# EAGLE board ArduinoBluetoothMatev13 (EAGLE 5.00)
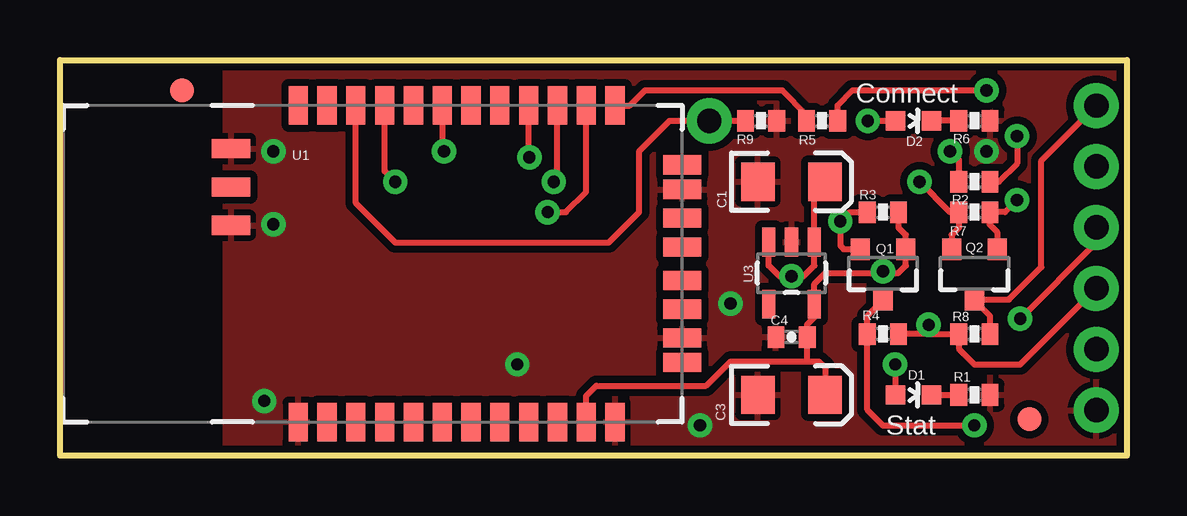
[diagram p0: board, top side]
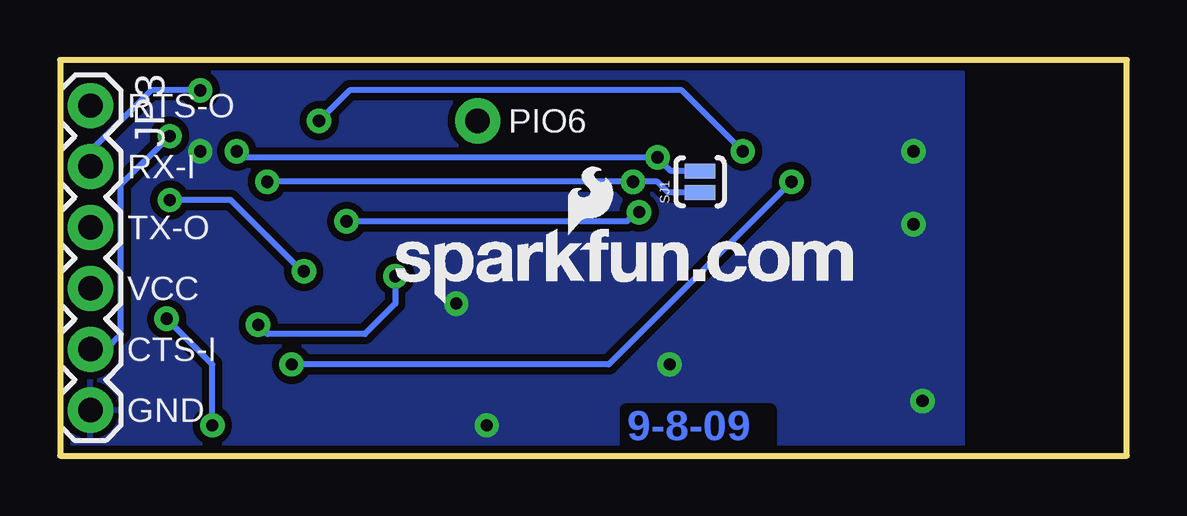
[diagram p1: board, bottom side, seen from below]

Size 44.45 x 16.51 mm. Coordinates in mm from the lower left corner, seen from the top.
Outline: 0,0 0,16.51 44.45,16.51 44.45,0 0,0
Copper layers (1*16): Top 0.035mm / dielectric 1.5mm / Bottom 0.035mm
Design rules "SparkFun": minimum track width 8mil, minimum drill 20mil, track to track 8mil, track to pad 8mil, pad to pad 8mil, via to via 8mil, smd to smd 8mil, copper to edge 9mil, drill to drill 8mil, minimum pad ring 12mil, minimum via ring 10mil, stop-mask expansion 4mil, vias tented up to drill 20mil, thermal gap 10mil

## Footprints (pad centres in the part's own frame; a part is rotated, then mirrored left to right if it is on the bottom)
EIA3216 = smd 1.4 x 1.6: A 1.4,0; C -1.4,0
0402-CAP = smd 0.7 x 0.9: 1 -0.65,0; 2 0.65,0
LED-0603 = smd 0.8 x 0.8: A 0,-0.75; C 0,0.75
FIDUCIAL-1X2 = smd 1 x 1: 1 0,0
1X01NS = drill 1.016 pad 1.88 round: 1 0,0
1X06 = drill 1.016 pad 1.88 round: 1 0,0; 2 2.54,0; 3 5.08,0; 4 7.62,0; 5 10.16,0; 6 12.7,0
SOT23-3 = smd 0.8 x 0.9: 1 -0.95,-1; 2 0.95,-1; 3 0,1.1
0402-RES = smd 0.7 x 0.9: 1 -0.65,0; 2 0.65,0
SJ_2S-NO = smd 0.635 x 1.27: 1 -0.45,0; 2 0.45,0
RN41 = smd 0.8 x 1.6: 1 -6.6,-6.6; 2 -5.4,-6.6; 3 -4.2,-6.6; 4 -3,-6.6; 5 -1.8,-6.6; 6 -0.6,-6.6; 7 0.6,-6.6; 8 1.8,-6.6; 9 3,-6.6; 10 4.2,-6.6; 11 5.4,-6.6; 12 6.6,-6.6; 13 6.6,6.6; 14 5.4,6.6; 15 4.2,6.6; 16 3,6.6; 17 1.8,6.6; 18 0.6,6.6; 19 -0.6,6.6; 20 -1.8,6.6; 21 -3,6.6; 22 -4.2,6.6; 23 -5.4,6.6; 24 -6.6,6.6 | smd 1.6 x 0.8: 25 -9.4,4.8; 26 -9.4,3.2; 27 -9.4,1.6; 28 9.4,3.1; 29 9.4,-3.1; 30 9.4,-4.122; 31 9.4,-1.9; 32 9.4,-0.7; 33 9.4,0.7; 34 9.4,1.9; 35 9.4,4.122
SOT23-5 = smd 0.55 x 1.2: 1 -0.95,-1.3; 2 0,-1.3; 3 0.95,-1.3; 4 0.95,1.3; 5 -0.95,1.3

## Placement (x,y rotation side)
C1  10uF  [EIA3216]  30.48,11.43 0 top
C3  10uF  [EIA3216]  30.48,2.54 0 top
C4  1uF  [0402-CAP]  30.48,4.95 180 top
D1  Red  [LED-0603]  35.56,2.54 270 top
D2  Green  [LED-0603]  35.56,13.97 270 top
JP1  FIDUCIAL1X2  [FIDUCIAL-1X2]  40.39,1.52 0 top
JP2  M01SMDNS  [1X01NS]  27.05,13.97 0 top
JP3  [1X06]  43.18,14.61 270 bottom
JP4  FIDUCIAL1X2  [FIDUCIAL-1X2]  5.08,15.24 0 top
Q1  MOSFET-NCHANNELSMD  [SOT23-3]  34.29,7.62 180 top
Q2  MOSFET-NCHANNELSMD  [SOT23-3]  38.1,7.62 180 top
R1  330  [0402-RES]  38.1,2.54 0 top
R2  10K  [0402-RES]  38.1,11.43 0 top
R3  10K  [0402-RES]  34.29,10.16 180 top
R4  10K  [0402-RES]  34.29,5.08 180 top
R5  10K  [0402-RES]  31.75,13.97 0 top
R6  330  [0402-RES]  38.1,13.97 0 top
R7  10K  [0402-RES]  38.1,10.16 180 top
R8  10K  [0402-RES]  38.1,5.08 0 top
R9  10K  [0402-RES]  29.21,13.97 180 top
SJ1  SOLDERJUMPERNO  [SJ_2S-NO]  17.78,11.43 90 bottom
U1  BLUETOOTH-RN41  [RN41]  16.53,8.01 0 top
U3  V_REG_LDOSMD  [SOT23-5]  30.48,7.62 180 top
U$1  LOGO-SFENEW  [SFE-NEW-WEBLOGO]  30.48,6.35 0 bottom
U$2  CREATIVE_COMMONS  [CREATIVE_COMMONS]  20.32,-8.89 0 top  (outside the outline)

## Library data of the parts
C1 C3 C4 D1 D2 JP1-JP4 Q1 Q2 R1-R9 SJ1 U3 U$1 U$2 = SparkFun
U1 = ScratchPad

## Nets
3.3V: C3.A C4.1 Q1.1 Q2.1 R3.1 R7.1 U1.11 U3.5
CTS: R2.1 SJ1.2 U1.16
CTS_5V: JP3.5 R2.2
D1: D1.C R1.1
D2: D2.C R6.1
GND: C1.C C3.C C4.2 JP3.6 R1.2 R6.2 R9.1 U1.1 U1.12 U1.25 U1.27 U1.28 U1.29 U3.2
N$1: D1.A U1.21
N$2: D2.A U1.19
PIO4: JP2.1 R9.2 U1.22
RTS: Q2.2 R7.2 SJ1.1 U1.15
RTS_5V: JP3.1 Q2.3 R8.2
RX: R5.1 U1.13
RX_5V: JP3.2 R5.2
TX: Q1.2 R3.2 U1.14
TX_5V: JP3.3 Q1.3 R4.2
VCC: C1.A JP3.4 R4.1 R8.1 U3.1 U3.3

## Tracks (layer width: path | path; a pad name or v marks a point on that pad's centre or on a via)
3.3V  (via drill 0.51)
  Top 0.254: Q2.1 39.05,9.34 38.73,9.65 38.75,9.67 R7.1 39.37,10.16 v39.88,10.67 | R3.1 34.94,9.51 35.24,9.21 Q1.1 35.24,7.93 34.92,7.62 34.29,7.62 | C3.A 31.88,3.68 31.62,3.94 31.11,3.94 | U1.11 21.93,2.5 22.35,2.92 26.92,2.92 27.94,3.94 31.11,3.94 | 34.29,7.62 31.88,7.62 31.43,7.17 U3.5 31.43,5.78 31.11,5.46 31.13,5.45 C4.1 31.13,3.95 31.11,3.94 | 34.29,7.62 v34.29,7.7
  Bottom 0.254: v39.88,10.67 37.34,10.67 34.29,7.62 v34.29,7.7
CTS  (via drill 0.51)
  Top 0.254: U1.16 19.53,12.48 v19.56,12.45 | R2.1 37.45,12.33 v37.08,12.7
  Bottom 0.254: SJ1.2 18.99,11.88 v19.56,12.45 36.83,12.45 v37.08,12.7
CTS_5V  (via drill 0.51)
  Top 0.254: R2.2 39.12,11.43 39.88,12.19 v39.88,13.34
  Bottom 0.254: JP3.5 42.55,4.45 41.91,5.08 41.91,11.3 v39.88,13.34
D1
  Top 0.254: 37.47,2.54 R1.1 D1.C
D2
  Top 0.254: 37.47,13.97 R6.1 D2.C
GND  (via drill 0.51)
  other vias: 27.94,6.35 26.67,1.27 38.61,12.7 8.89,12.7 8.89,9.65 8.51,2.29 19.05,3.81
  pour Bottom (isolate 0.305): 6.86,0 44.4,0 44.4,16 6.86,16
  pour Top (isolate 0.305): 6.86,0 44.4,0 44.4,16 6.86,16
N$1  (via drill 0.51)
  Top 0.254: D1.A 34.81,3.29 v34.8,3.81 | U1.21 13.53,11.87 v13.97,11.43
  Bottom 0.254: v34.8,3.81 21.59,3.81 v13.97,11.43
N$2  (via drill 0.51)
  Top 0.254: U1.19 15.93,12.78 v16,12.7 | v33.66,13.97 D2.A
  Bottom 0.254: v16,12.7 18.54,15.24 32.38,15.24 v33.66,13.97
PIO4
  Top 0.254: U1.22 12.33,10.53 13.97,8.89 22.86,8.89 24.13,10.16 24.13,12.7 25.4,13.97 JP2.1 R9.2
RTS  (via drill 0.51)
  Top 0.254: Q2.2 37.15,9.21 37.45,9.51 R7.2 37.45,10.18 37.07,10.18 v35.81,11.43 | U1.15 20.73,11.58 v20.57,11.43
  Bottom 0.254: SJ1.1 19.11,10.98 19.56,11.43 v20.57,11.43 v35.81,11.43
RTS_5V
  Top 0.254: R8.2 38.75,5.83 38.1,6.48 Q2.3 39.54,6.52 40.89,7.87 40.89,12.32 JP3.1
RX
  Top 0.254: R5.1 31.1,14.24 30.1,15.24 24.38,15.24 23.75,14.61 U1.13
RX_5V  (via drill 0.51)
  Top 0.254: R5.2 32.4,14.62 33.02,15.24 v38.61,15.24
  Bottom 0.254: JP3.2 43.18,12.7 40.64,15.24 v38.61,15.24
TX  (via drill 0.51)
  Top 0.254: R3.2 32.89,10.16 v32.51,9.78 32.51,8.76 32.66,8.62 Q1.2 | U1.14 21.93,11 21.08,10.16 v20.32,10.16
  Bottom 0.254: v20.32,10.16 20.45,10.16 20.83,9.78 v32.51,9.78
TX_5V  (via drill 0.51)
  Top 0.254: 34.29,6.6 Q1.3 34.29,6.48 33.64,5.83 R4.2 33.64,1.92 34.29,1.27 v38.1,1.27 | JP3.3 43.18,8.89 v40.01,5.71
  Bottom 0.254: v40.01,5.71 38.1,3.81 v38.1,1.27
VCC  (via drill 0.51)
  Top 0.254: U3.3 29.53,7.93 29.97,7.49 v30.48,7.49 30.99,7.49 31.43,7.93 U3.1 31.43,10.98 C1.A | R8.1 37.47,5.08 | 34.92,5.08 R4.1 36.2,5.08 | 36.2,5.08 R8.1 | v36.2,5.46 36.2,5.08 | R8.1 37.45,4.46 38.1,3.81 40.01,3.81 JP3.4
  Bottom 0.254: v30.48,7.49 30.48,6.35 31.75,5.08 35.81,5.08 v36.2,5.46

## Text on the board
Bottom: 9-8-09
tPlace: Connect | Stat
bPlace: RTS-O | PIO6 | RX-I | TX-O | VCC | CTS-I | GND